# Altium PCB 1.PcbDoc
Units mm, origin at the board's own origin, x right, y up, seen from the top; angles counter-clockwise.
Board outline 152.4 x 101.6 mm, 2 copper layers (Top Layer, Bottom Layer); 30 components, 20 nets, 76 pads, 0 vias.
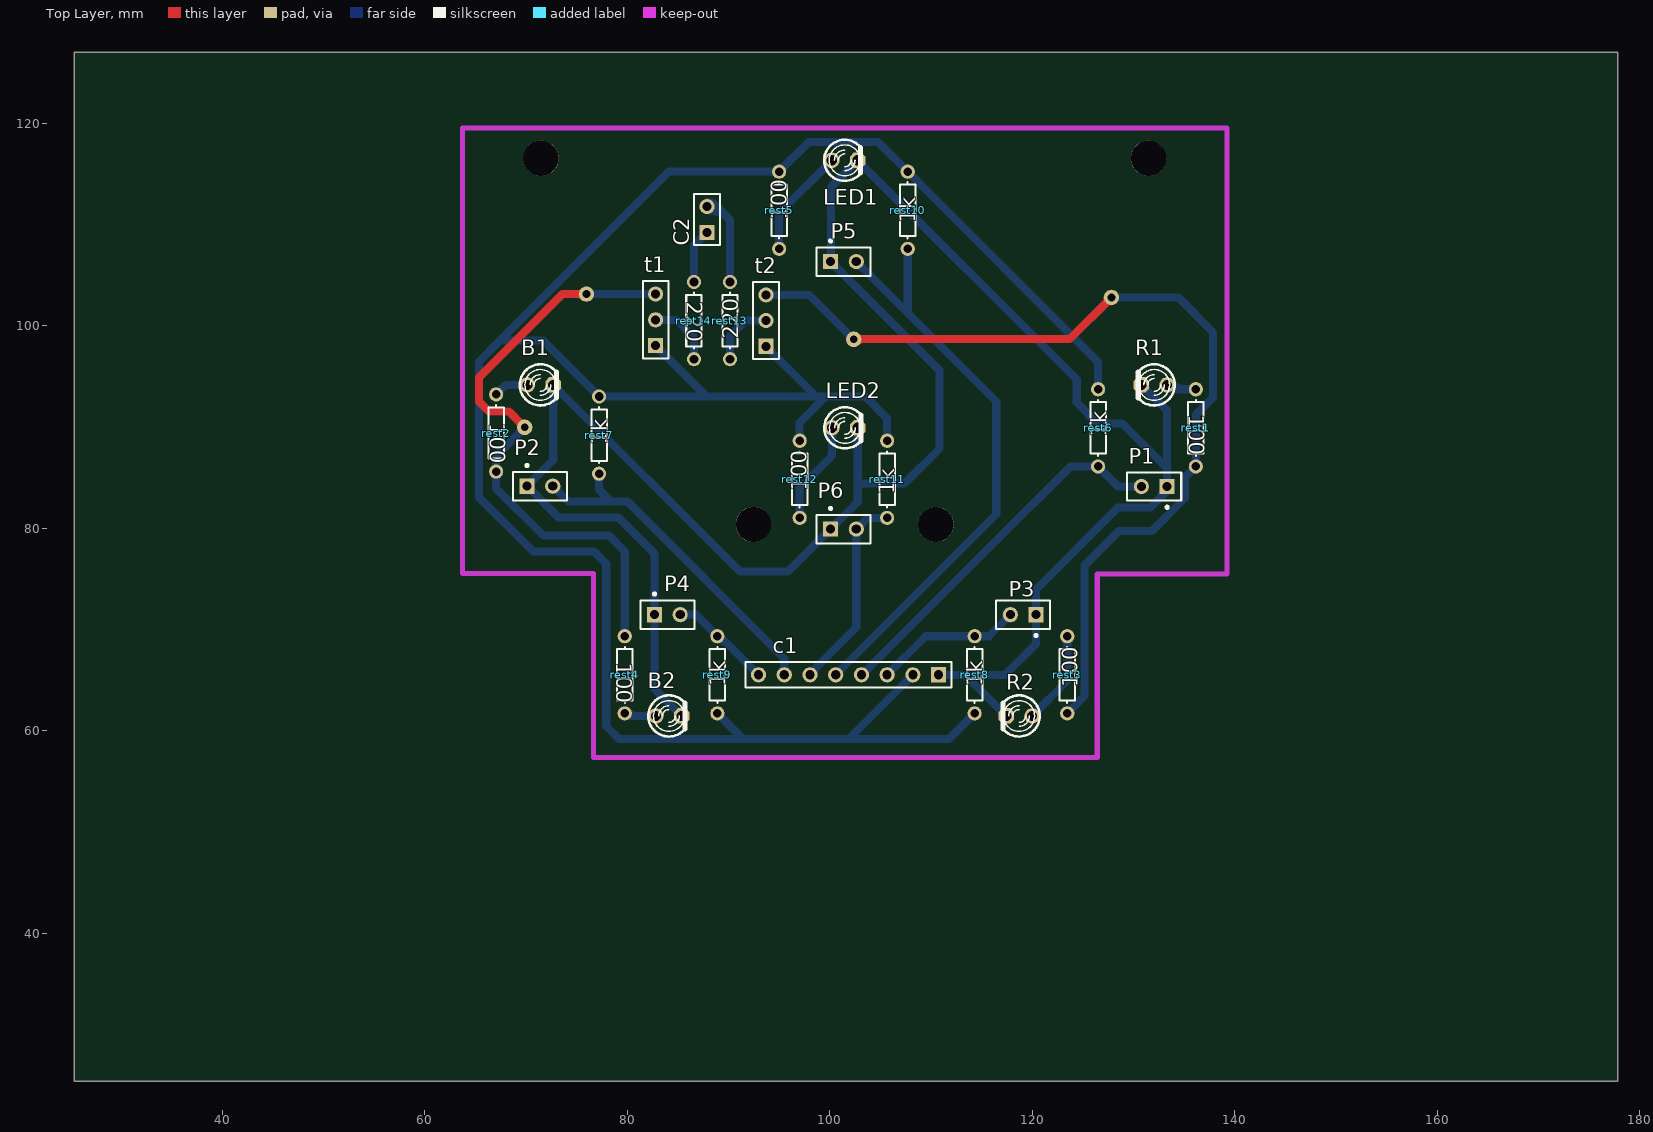
[diagram p0: Top Layer view]
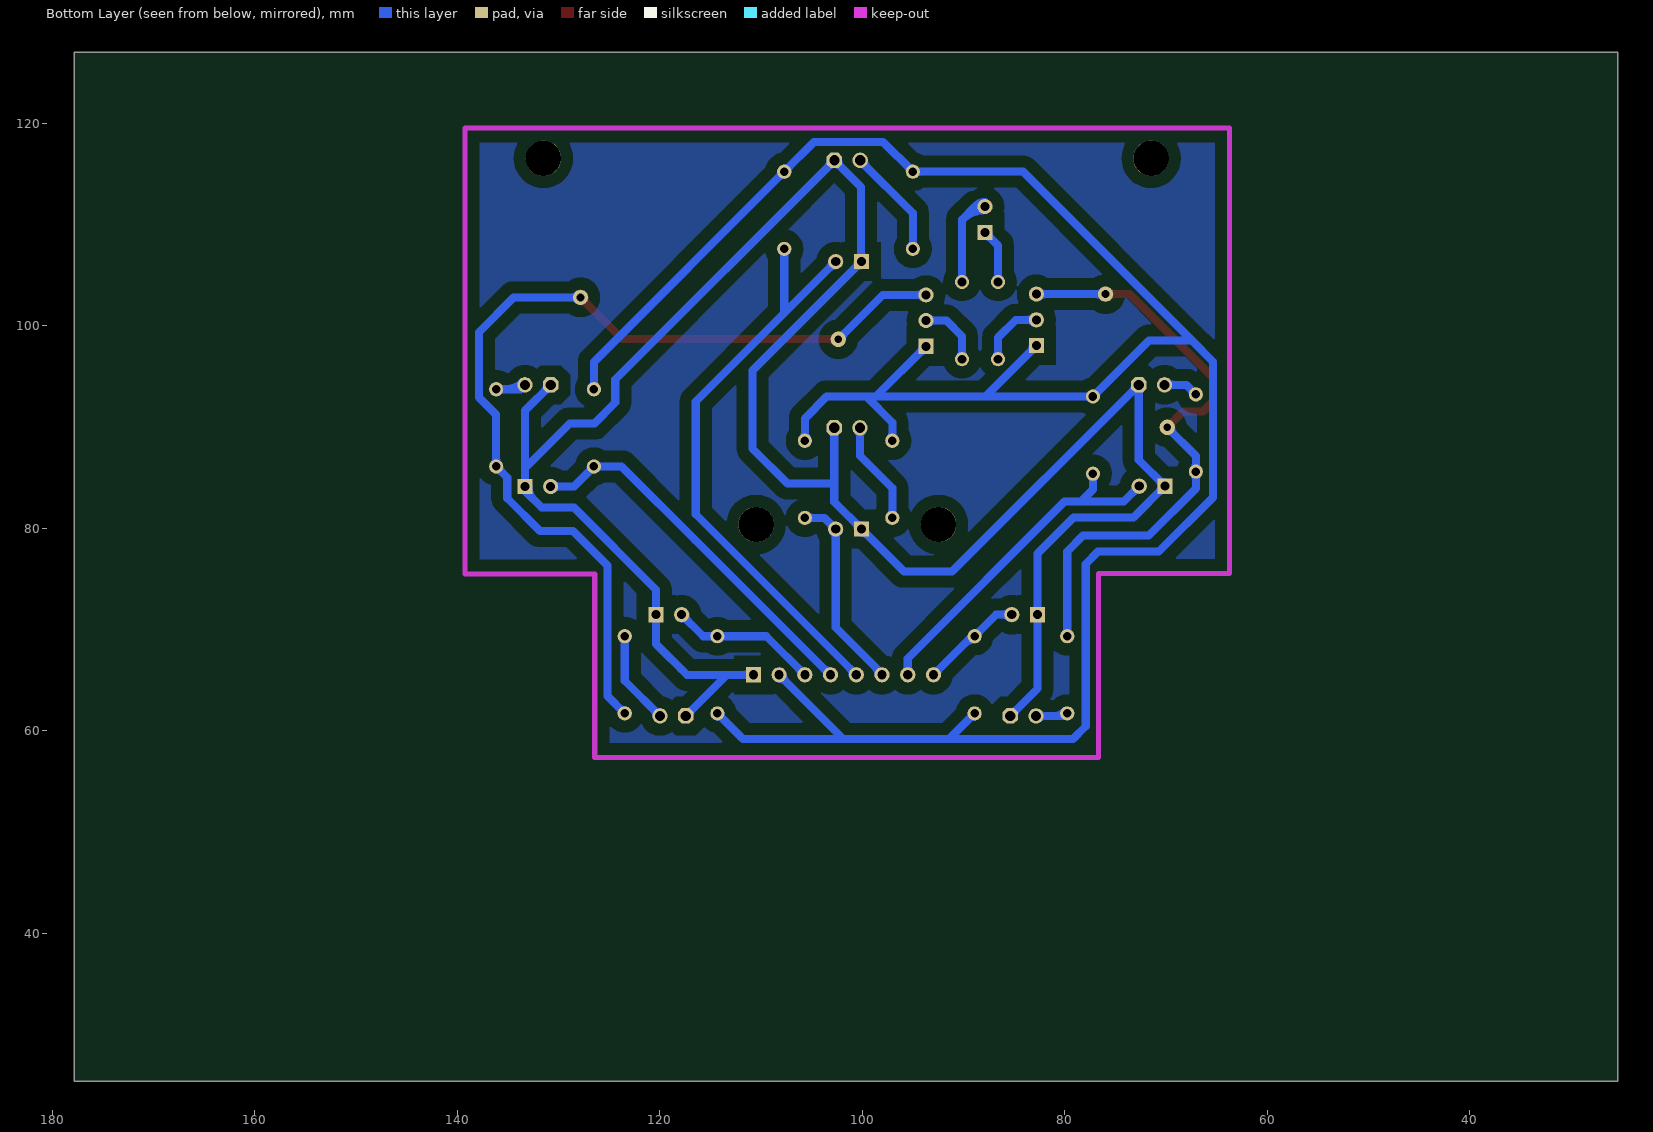
[diagram p1: Bottom Layer view, seen from below]

## Layer stack, top to bottom
Top Layer: signal copper 0.0356
Dielectric: dielectric 0.32, FR-4, Dk 4.8
Bottom Layer: signal copper 0.0356

## Board outline
25.4,25.4 177.8,25.4 177.8,127 25.4,127

## Design rules (kind name [scope] priority, off if disabled: settings)
Clearance [All] p1: gap=0.6
PolygonConnect [All] p1: connectstyle=Relief reliefconductorwidth=0.254 reliefentries=4 polygonreliefangle="90 Angle"
RoutingVias [All] p1: holewidth=0.711 width=1.27 viastyle="Through Hole" minholewidth=0.711 minwidth=1.27 maxholewidth=0.711 maxwidth=1.27
SilkscreenOverComponentPads [All] p1: minsilkscreentomaskgap=0.254
SolderMaskExpansion [All] p1: expansion=0.102
Width [All] p1: maxlimit=0.8 minlimit=0.5 preferedwidth=0.7
27 further rules are at their usual default settings.

## Components (designator, comment, footprint, x,y, rotation, side; value= is the part's Value field where it differs from the comment)
B1 "LED" My_LED3MM 71.42,94.158 r0 top
B2 "LED" My_LED3MM 84.112,61.468 r0 top
c1 "Header 8" HDR1X8 110.744,65.532 r180 top
C2 "Header 2" HDR1X2 87.884,109.22 r90 top
LED1 "LED" My_LED3MM 101.473,116.332 r0 top
LED2 "LED" My_LED3MM 101.492,89.916 r0 top
P1 "Photo Sen" PIN2 133.304,84.128 r180 top
P2 "Photo Sen" PIN2 70.104,84.158 r0 top
P3 "Photo Sen" PIN2 120.366,71.468 r180 top
P4 "Photo Sen" PIN2 82.689,71.468 r0 top
P5 "Photo Sen" PIN2 100.076,106.332 r0 top
P6 "Photo Sen" PIN2 100.076,79.916 r0 top
R1 "LED" My_LED3MM 132.029,94.158 r180 top
R2 "LED" My_LED3MM 118.696,61.468 r180 top
rest1 "100" AXIAL-0.3 136.144,89.916 r90 top
rest2 "100" AXIAL-0.3 67.056,89.408 r90 top
rest3 "100" AXIAL-0.3 123.444,65.532 r90 top
rest4 "100" AXIAL-0.3 79.756,65.532 r270 top
rest5 "100" AXIAL-0.3 94.996,111.402 r270 top
rest6 "1k" AXIAL-0.3 126.492,89.916 r270 top
rest7 "1k" AXIAL-0.3 77.216,89.2 r270 top
rest8 "1k" AXIAL-0.3 114.3,65.532 r90 top
rest9 "1k" AXIAL-0.3 88.9,65.532 r90 top
rest10 "1k" AXIAL-0.3 107.696,111.402 r270 top
rest11 "1k" AXIAL-0.3 105.664,84.836 r270 top
rest12 "100" AXIAL-0.3 97.028,84.836 r270 top
rest13 "220" AXIAL-0.3 90.145,100.508 r270 top
rest14 "220" AXIAL-0.3 86.589,100.508 r270 top
t1 "Header 3" HDR1X3 82.804,98.044 r90 top (schematic designator trans1)
t2 "Header 3" HDR1X3 93.701,97.968 r90 top (schematic designator trans2)

## Footprints (in the part's own frame and the unit in brackets; to place one, negate y for a bottom-side part, rotate by r counter-clockwise, add the part's x,y. Pads: shape width x height; smd on the part's side, far side on the other; paste and mask are expansions set on the pad)
AXIAL-0.3 [mm] "Axial Device, Thru-Hole; 2 Leads; 0.3 in Pin Spacing"
  round 1.4 hole 0.85: 1(-3.81,0) 2(3.81,0)
  silkscreen extent -2.77,-0.76 2.77,0.76
HDR1X2 [mm] "Connector; Header; 2 Position"
  rect 1.5x1.5 hole 0.9: 1(0,0)
  round 1.5 hole 0.9: 2(2.54,0)
  silkscreen extent -1.27,-1.27 3.81,1.27
HDR1X3 [mm] "Connector; Header; 3 Position"
  rect 1.5x1.5 hole 0.9: 1(0,0)
  round 1.5 hole 0.9: 2(2.54,0) 3(5.08,0)
  silkscreen extent -1.27,-1.27 6.35,1.27
HDR1X8 [mm] "Connector; Header; 8 Position"
  rect 1.5x1.5 hole 0.9: 1(0,0)
  round 1.5 hole 0.9: 2(2.54,0) 3(5.08,0) 4(7.62,0) 5(10.16,0) 6(12.7,0) 7(15.24,0) 8(17.78,0)
  silkscreen extent -1.27,-1.27 19.05,1.27
My_LED3MM [mil]
  round 60 hole 40: A(-50,0)
  oct 60x60 hole 40: K(50,0)
  silkscreen extent -80,-80 62,80
PIN2 [mm] "Photosensitive Diode; 2 Leads"
  rect 1.5x1.5 hole 0.9: 1(0,0)
  round 1.5 hole 0.9: 2(2.54,0)
  silkscreen extent -1.4,-1.4 3.94,2.17

## Part data
B1 B2 LED1 LED2 R1 R2: "Typical INFRARED GaAs LED"
c1: "Header, 8-Pin"
C2: "Header, 2-Pin"
P1 P2 P3 P4 P5 P6: "Photosensitive Diode"
rest1 rest2 rest3 rest4 rest5 rest6 rest7 rest8 rest9 rest10 rest11 rest12 rest13 rest14: library part Res, "resistor 1/4 wat"
t1 t2: "Header, 3-Pin"

## Free pads (board coordinates)
  round 3.5 hole 3.5: 0(71.473,116.534) 0(92.473,80.372) 0(110.473,80.372) 0(131.473,116.534)
  round 1.524 hole 0.762: 0(127.813,102.794) 1(102.362,98.654) 2(75.971,103.124) 3(69.875,89.967)

## Nets (pads, with @x,y where several pads share a name; then routed paths per layer and width w, separated by ;. In a path a pad name is that pad's centre, name@x,y a point inside that pad or via, vN(x,y) a via of type N, cw(c..) or ccw(c..) an arc to the next point about the centre after c; other vN are vias at no path point)
GND: B1.K B2.K c1.1 LED1.K LED2.K P1.1 P2.1 P3.1 P4.1 P5.1 P6.1 R1.K R2.K | length 262.4
  Bottom Layer w0.8: P2.1@70.104,83.808 cw(c70.104,82.923) P2.1@70.73,83.549 ; P2.1 72.69,86.744 B1.K ; P2.1@70.104,84.508 ccw(c70.104,85.353) 70.701,84.755 ccw(c71.299,84.158) 70.454,84.158 ccw(c71.259,84.158) P2.1@70.69,83.588 ; P2.1@70.169,84.158 70.12,84.158 73.227,81.051 79.146,81.051 82.689,77.509 82.689,75.26 ; B1.K@72.434,93.902 cw(c71.817,93.284) 72.69,93.284 cw(c73.564,93.284) B1.K@72.946,93.902 ; B1.K@72.69,93.796 cw(c72.69,92.911) 73.316,93.537 ; B1.K@72.693,94.16 91.135,75.717 95.877,75.717 P6.1 102.762,82.602 102.762,84.43 ; B1.K@73.052,94.158 ccw(c73.916,94.158) 73.305,93.547 ; P4.1@82.442,71.221 cw(c81.844,70.623) 82.689,70.623 cw(c83.534,70.623) P4.1@82.937,71.221 ; P4.1@82.442,71.715 ccw(c81.844,72.313) 82.689,72.313 ccw(c83.534,72.313) P4.1@82.937,71.715 ; P4.1@82.689,71.589 P4.1 ; 82.689,75.756 82.689,75.26 ; B2.K@85.02,61.468 ccw(c84.146,61.468) 84.764,62.086 ccw(c85.382,62.704) B2.K@85.382,61.83 ; B2.K 82.689,64.161 P4.1 ; P6.1@99.726,79.916 cw(c98.881,79.916) 99.479,79.319 cw(c100.076,78.721) P6.1@100.076,79.566 ; P5.1@99.829,106.579 ccw(c99.17,107.238) 100.101,107.238 ; P6.1@100.076,80.266 ccw(c100.076,81.111) 100.673,80.513 ccw(c101.271,79.916) P6.1@100.426,79.916 ; P5.1@100.076,105.982 cw(c100.076,105.137) 100.673,105.735 cw(c101.271,106.332) P5.1@100.426,106.332 ; 100.101,107.116 ccw(c100.86,107.116) P5.1@100.323,106.579 ; LED1.K@102.381,116.332 cw(c101.507,116.332) 102.125,115.714 cw(c102.743,115.096) 102.743,115.97 cw(c102.743,115.096) 103.361,115.714 cw(c103.979,116.332) LED1.K@103.105,116.332 ; LED2.K@102.506,89.66 cw(c101.888,89.042) 102.762,89.042 cw(c103.636,89.042) LED2.K@103.018,89.66 ; LED2.K 102.762,84.43 ; c1.1 113.362,65.532 ; c1.1@110.991,65.285 cw(c111.589,64.687) 111.589,65.532 cw(c111.589,66.377) c1.1@110.991,65.779 ; R2.K@117.064,61.468 ccw(c116.19,61.468) 116.808,62.086 ccw(c117.426,62.704) R2.K@117.426,61.83 ; R2.K 113.362,65.532 ; 117.919,66.133 120.366,68.58 ; P3.1@120.119,71.221 cw(c119.521,70.623) 120.366,70.623 cw(c121.211,70.623) P3.1@120.614,71.221 ; P3.1@120.119,71.715 ccw(c119.521,72.313) 120.366,72.313 ccw(c121.211,72.313) P3.1@120.614,71.715 ; R1.K@130.759,93.796 cw(c130.759,92.922) 131.377,93.54 cw(c131.995,94.158) R1.K@131.121,94.158 ; R1.K 133.304,91.613 133.304,85.923 ; 132.402,82.796 ccw(c131.07,84.128) P1.1@132.954,84.128 ; P1.1@133.057,84.375 ccw(c132.459,84.973) 133.304,84.973 ccw(c134.149,84.973) P1.1@133.551,84.375 ; P4.1 82.689,75.26 ; 102.762,84.43 107.391,84.43 110.82,87.859 110.82,95.588 100.101,106.307 100.101,113.69 LED1.K 124.384,94.691 124.384,92.405 126.441,90.348 128.88,90.348 133.304,85.923 ; 113.362,65.532 117.318,65.532 120.366,68.58 ; 120.366,68.58 P3.1 120.366,73.935 128.473,82.042 131.648,82.042 133.304,83.698 P1.1 133.304,85.923
NetB1_A: B1.A rest2.2 | length 6
  Bottom Layer w0.8: rest2.2 67.996,94.158 B1.A ; rest2.2@67.056,93.518 ccw(c67.056,94.242) 67.568,93.73 ccw(c68.08,93.218) rest2.2@67.356,93.218 ; B1.A@69.894,93.902 ccw(c69.277,93.284) 69.277,94.158 ccw(c69.277,95.032) B1.A@69.894,94.414
NetB2_A: B2.A rest4.2 | length 5.8
  Bottom Layer w0.8: rest4.2 80.01,61.468 B2.A ; rest4.2@79.968,61.934 ccw(c81.093,63.059) 81.093,61.468 ; B2.A@82.586,61.212 ccw(c81.968,60.594) 81.968,61.468 ccw(c81.968,62.342) B2.A@82.586,61.724
NetC1_3: c1.3 P3.2 rest8.2 | length 19.6
  Bottom Layer w0.8: c1.3 109.474,69.342 rest8.2 115.7,69.342 P3.2 ; c1.3@105.664,65.882 ccw(c105.664,66.727) 106.261,66.129 ccw(c106.859,65.532) c1.3@106.014,65.532 ; rest8.2@114.088,69.13 ccw(c113.576,68.618) 113.576,69.342 ccw(c113.576,70.066) rest8.2@114.088,69.554 ; rest8.2@114.512,69.13 cw(c115.024,68.618) 115.024,69.342 cw(c115.024,70.066) rest8.2@114.512,69.554 ; P3.2@117.476,71.468 cw(c116.631,71.468) 117.229,70.871 cw(c117.826,70.273) P3.2@117.826,71.118
NetC1_4: c1.4 P1.2 rest6.2 | length 41.7
  Bottom Layer w0.8: c1.4 103.189,65.532 116.288,78.631 ; c1.4@103.124,65.882 ccw(c103.124,66.884) 103.833,66.176 ; 116.55,78.892 116.288,78.631 ; rest6.2@126.28,85.894 ccw(c125.768,85.382) 125.768,86.106 ccw(c125.768,86.83) rest6.2@126.28,86.318 ; rest6.2@126.492,85.806 cw(c126.492,85.082) 127.004,85.594 cw(c127.516,86.106) rest6.2@126.792,86.106 ; P1.2@130.517,83.881 ccw(c129.919,83.283) 129.919,84.128 ccw(c129.919,84.973) P1.2@130.517,84.375 ; P1.2 128.47,84.128 rest6.2 123.763,86.106 116.288,78.631
NetC1_5: c1.5 P5.2 rest10.2 | length 63.2
  Bottom Layer w0.8: c1.5 116.434,81.382 116.434,92.514 107.696,101.252 ; c1.5@100.584,65.882 ccw(c100.584,66.727) 101.181,66.129 ccw(c101.779,65.532) c1.5@100.934,65.532 ; P5.2@102.616,105.982 cw(c102.616,105.137) 103.213,105.735 cw(c103.811,106.332) P5.2@102.966,106.332 ; P5.2 107.696,101.252 ; rest10.2@107.484,107.38 cw(c106.972,106.868) 107.696,106.868 cw(c108.42,106.868) rest10.2@107.908,107.38 ; rest10.2 107.696,101.252
NetC1_6: c1.6 P6.2 rest11.2 | length 24.5
  Bottom Layer w0.8: c1.6 97.993,65.583 102.616,70.206 P6.2 103.726,81.026 rest11.2 ; c1.6@98.394,65.532 cw(c99.484,65.532) 98.713,66.303 ; P6.2@102.369,79.669 cw(c101.771,79.071) 102.616,79.071 cw(c103.461,79.071) P6.2@102.863,79.669 ; P6.2@102.616,80.266 ccw(c102.616,81.111) 103.213,80.513 ccw(c103.811,79.916) P6.2@102.966,79.916 ; rest11.2@105.452,80.814 ccw(c104.94,80.302) 104.94,81.026 ccw(c104.94,81.75) rest11.2@105.452,81.238
NetC1_7: c1.7 P2.2 rest7.2 | length 38.5
  Bottom Layer w0.8: P2.2@72.644,83.808 cw(c72.644,82.963) 73.241,83.56 cw(c73.839,84.158) P2.2@72.994,84.158 ; P2.2 74.176,82.626 80.01,82.626 95.504,67.132 c1.7 ; rest7.2@77.004,85.178 cw(c76.492,84.666) 77.216,84.666 cw(c77.94,84.666) rest7.2@77.428,85.178 ; rest7.2 77.216,83.82 78.359,82.677 ; c1.7@95.257,65.779 ccw(c94.659,66.377) 95.504,66.377 ccw(c96.349,66.377) c1.7@95.751,65.779
NetC1_8: c1.8 P4.2 rest9.2 | length 15
  Bottom Layer w0.8: P4.2 86.774,71.468 rest9.2 89.154,69.342 c1.8 ; P4.2@85.477,71.221 cw(c86.074,70.623) 86.074,71.468 cw(c86.074,72.313) P4.2@85.477,71.715 ; rest9.2@88.6,69.342 ccw(c87.876,69.342) 88.388,69.854 ccw(c88.9,70.366) rest9.2@88.9,69.642 ; rest9.2@88.9,69.042 cw(c88.9,67.705) 89.846,68.65 ; c1.8@92.614,65.532 ccw(c91.769,65.532) 92.367,66.129 ccw(c92.964,66.727) c1.8@92.964,65.882
NetC2_1: C2.1 rest14.1 | length 7.9
  Bottom Layer w0.8: rest14.1@86.376,104.53 ccw(c85.864,105.042) 86.589,105.042 ccw(c87.313,105.042) rest14.1@86.801,104.53 ; rest14.1 86.589,107.925 C2.1 ; C2.1@87.534,109.22 cw(c86.689,109.22) 87.287,108.623 cw(c87.884,108.025) C2.1@87.884,108.87
NetC2_2: C2.2 rest13.1 | length 16.3
  Bottom Layer w0.8: C2.2@87.884,111.41 cw(c87.884,108.235) 90.129,110.48 ; C2.2 88.849,111.76 90.145,110.465 rest13.1 ; C2.2@87.884,112.21 cw(c87.884,110.966) 88.763,111.846 ; C2.2@88.055,111.455 cw(c88.576,110.522) 89.332,111.277 ; C2.2@88.131,111.513 cw(c88.729,110.915) 88.729,111.76 cw(c88.729,112.605) C2.2@88.131,112.007 ; rest13.1@89.932,104.53 ccw(c89.42,105.042) 90.145,105.042 ccw(c90.869,105.042) rest13.1@90.357,104.53
NetLED1_A: LED1.A rest5.2 | length 12.9
  Bottom Layer w0.8: rest5.2@94.983,107.592 94.983,111.112 LED1.A ; 94.983,108.347 ccw(c95.751,108.347) rest5.2@95.208,107.804 ; LED1.A@99.841,116.332 cw(c98.967,116.332) 99.585,115.714 cw(c100.203,115.096) LED1.A@100.203,115.97
NetLED2_A: LED2.A rest12.2 | length 12.7
  Bottom Layer w0.8: rest12.2@96.816,81.238 ccw(c96.304,81.75) 97.028,81.75 ccw(c97.752,81.75) rest12.2@97.24,81.238 ; rest12.2 97.028,83.972 100.222,87.166 LED2.A ; LED2.A@99.966,89.66 cw(c99.348,89.042) 100.222,89.042 cw(c101.096,89.042) LED2.A@100.478,89.66
NetR1_A: R1.A rest1.2 | length 6
  Bottom Layer w0.8: R1.A 133.731,93.726 rest1.2 ; R1.A@133.555,94.414 ccw(c135.216,96.074) 135.216,93.726 ; rest1.2@135.932,93.514 ccw(c135.42,93.002) 135.42,93.726 ccw(c135.42,94.45) rest1.2@135.932,93.938
NetR2_A: R2.A rest3.2 | length 11.8
  Bottom Layer w0.8: R2.A 123.444,64.946 rest3.2 ; R2.A@119.966,61.83 ccw(c119.966,62.704) 120.584,62.086 ccw(c121.202,61.468) R2.A@120.328,61.468 ; rest3.2@123.232,69.13 cw(c122.72,68.618) 123.444,68.618 cw(c124.168,68.618) rest3.2@123.656,69.13
Netrest13_2: rest13.2 t2.2 | length 8.9
  Bottom Layer w0.8: rest13.2@89.932,96.91 ccw(c89.42,97.422) 90.145,97.422 ccw(c90.869,97.422) rest13.2@90.357,96.91 ; rest13.2 90.145,98.958 91.694,100.508 t2.2 ; t2.2@93.453,100.26 ccw(c92.856,99.663) 92.856,100.508 ccw(c92.856,101.353) t2.2@93.453,100.755
Netrest14_2: rest14.2 t1.2 | length 9.1
  Bottom Layer w0.8: t1.2 84.836,100.584 86.589,98.831 rest14.2 ; t1.2@83.051,100.337 cw(c83.649,99.739) 83.649,100.584 cw(c83.649,101.429) t1.2@83.051,100.831 ; rest14.2@86.376,96.91 ccw(c85.864,97.422) 86.589,97.422 ccw(c87.313,97.422) rest14.2@86.801,96.91
VCC: c1.2 rest5.1 rest6.1 rest7.1 rest8.1 rest9.1 rest10.1 rest11.1 rest12.1 t1.1 t2.1 | length 257.4
  Bottom Layer w0.8: rest7.1@76.916,93.01 ccw(c76.192,93.01) 76.704,93.522 ccw(c77.216,94.034) rest7.1@77.216,93.31 ; rest7.1@77.428,92.798 cw(c77.94,92.286) 77.94,93.01 cw(c77.94,93.734) rest7.1@77.428,93.222 ; t1.1@82.804,97.694 cw(c82.804,96.849) 83.401,97.447 cw(c83.999,98.044) t1.1@83.154,98.044 ; t1.1 87.838,93.01 rest7.1 71.699,98.527 67.437,98.527 ; 87.884,93.01 98.658,93.01 ; rest9.1@88.9,61.422 cw(c88.9,60.698) 89.412,61.21 cw(c89.924,61.722) rest9.1@89.2,61.722 ; rest9.1 91.427,59.195 ; t2.1@93.701,97.618 cw(c93.701,96.773) 94.298,97.37 cw(c94.896,97.968) t2.1@94.051,97.968 ; t2.1 98.658,93.01 ; rest5.1@94.784,115 ccw(c94.272,114.488) 94.272,115.212 ccw(c94.272,115.936) rest5.1@94.784,115.424 ; rest5.1@94.996,115.512 ccw(c94.996,116.236) 95.508,115.724 ccw(c96.02,115.212) rest5.1@95.296,115.212 ; rest12.1@96.816,88.858 ccw(c96.304,89.37) 97.028,89.37 ccw(c97.752,89.37) rest12.1@97.24,88.858 ; rest12.1 97.028,90.445 99.593,93.01 ; 101.892,59.22 c1.2 ; 102.332,93.01 101.524,93.01 ; rest11.1@105.452,88.858 ccw(c104.94,89.37) 105.664,89.37 ccw(c106.388,89.37) rest11.1@105.876,88.858 ; rest11.1 105.664,90.856 103.51,93.01 101.524,93.01 ; rest10.1@107.396,115.212 ccw(c106.672,115.212) 107.184,115.724 ccw(c107.696,116.236) rest10.1@107.696,115.512 ; rest10.1@107.696,114.912 cw(c107.696,114.188) 108.208,114.7 cw(c108.72,115.212) rest10.1@107.996,115.212 ; c1.2@107.854,65.532 cw(c107.009,65.532) 107.607,64.935 cw(c108.204,64.337) c1.2@108.204,65.182 ; rest8.1@114,61.722 cw(c113.276,61.722) 113.788,61.21 cw(c114.3,60.698) rest8.1@114.3,61.422 ; rest8.1 111.76,59.182 79.197,59.182 77.927,60.452 77.927,76.479 76.708,77.699 70.714,77.699 65.356,83.056 65.356,96.446 67.437,98.527 ; rest6.1@126.28,93.938 ccw(c125.768,94.45) 126.492,94.45 ccw(c127.216,94.45) rest6.1@126.704,93.938 ; rest6.1 126.492,96.416 rest10.1 104.747,118.161 97.945,118.161 rest5.1 84.122,115.212 67.437,98.527 ; 98.658,93.01 99.593,93.01 ; 99.593,93.01 101.524,93.01
VCC1: pad.2 pad.3 rest2.1 rest4.1 t1.3 | length 69.9
  Top Layer w0.8: pad.3@69.513,89.967 ccw(c68.639,89.967) 69.257,90.585 ccw(c69.875,91.203) pad.3@69.875,90.329 ; pad.3 68.324,91.518 66.352,91.518 65.356,92.514 65.356,94.871 73.609,103.124 pad.2 ; pad.2@75.715,102.868 ccw(c75.097,102.25) 75.097,103.124 ccw(c75.097,103.998) pad.2@75.715,103.38
  Bottom Layer w0.8: rest2.1@66.844,85.386 cw(c66.332,84.874) 67.056,84.874 cw(c67.78,84.874) rest2.1@67.268,85.386 ; rest2.1@66.844,85.81 ccw(c66.332,86.322) 67.056,86.322 ccw(c67.78,86.322) rest2.1@67.268,85.81 ; pad.3@69.513,89.967 cw(c68.639,89.967) 69.257,89.349 cw(c69.875,88.731) pad.3@69.875,89.605 ; pad.3 67.056,87.147 rest2.1 67.056,83.922 71.704,79.273 78.181,79.273 79.756,77.699 rest4.1 ; pad.2 t1.3 ; pad.2@76.227,102.868 cw(c76.845,102.25) 76.845,103.124 cw(c76.845,103.998) pad.2@76.227,103.38 ; rest4.1@79.544,69.554 ccw(c79.032,70.066) 79.756,70.066 ccw(c80.48,70.066) rest4.1@79.968,69.554 ; t1.3@82.557,102.877 ccw(c81.959,102.279) 81.959,103.124 ccw(c81.959,103.969) t1.3@82.557,103.371
VCC2: pad.0@127.813,102.794 pad.1 rest1.1 rest3.1 t2.3 | length 104.9
  Top Layer w0.8: pad.1@102.362,98.679 123.698,98.679 pad.0@127.813,102.794 ; pad.1@102.618,98.398 cw(c103.297,97.718) 103.297,98.679 ; pad.1@102.618,98.91 ccw(c103.175,99.466) 103.175,98.679 ; pad.0@127.451,102.794 cw(c126.577,102.794) 127.195,102.176 cw(c127.813,101.558) pad.0@127.813,102.432
  Bottom Layer w0.8: t2.3 97.968,103.048 pad.1 ; t2.3@93.948,102.8 cw(c94.546,102.203) 94.546,103.048 cw(c94.546,103.893) t2.3@93.948,103.295 ; pad.1@102,98.654 ccw(c101.126,98.654) 101.744,99.272 ccw(c102.362,99.89) pad.1@102.362,99.016 ; rest3.1 125.144,63.422 125.144,76.325 128.549,79.731 131.821,79.731 135.054,82.964 135.054,85.016 rest1.1 136.144,91.221 137.852,92.929 137.852,94.536 137.852,97.751 137.852,99.359 134.417,102.794 pad.0@127.813,102.794 ; rest3.1@123.444,62.022 ccw(c123.444,62.746) 123.956,62.234 ccw(c124.468,61.722) rest3.1@123.744,61.722 ; pad.0@128.069,102.538 cw(c128.687,101.92) 128.687,102.794 cw(c128.687,103.668) pad.0@128.069,103.05 ; rest1.1@135.844,86.106 cw(c135.12,86.106) 135.632,85.594 cw(c136.144,85.082) rest1.1@136.144,85.806 ; rest1.1@135.932,86.318 ccw(c135.42,86.83) 136.144,86.83 ccw(c136.868,86.83) rest1.1@136.356,86.318

## Polygon pours and split planes (outlines as drawn)
no net on Bottom Layer "Top Layer-No Net" (solid): 63.957,119.534 64.187,119.304 139.222,119.304 139.222,75.496 126.644,75.496 126.644,57.778 126.238,57.372 76.652,57.372 76.652,75.159 76.068,75.743 63.713,75.743 63.713,119.304

## Keep-outs
Keep-Out Layer:
  lines w0.5: 63.713,75.521 63.713,119.534 139.222,119.534 139.222,75.496 126.406,75.496 126.406,57.372 76.652,57.372 76.652,75.521 63.713,75.521

## Dimensions
63.713,119.534 to 139.222,119.534 on Top Overlay